# Altium PCB ESP32_RGB_Controller.PcbDoc
Units mm, origin at the board's own origin, x right, y up, seen from the top; angles counter-clockwise.
Board outline 30.23 x 52.83 mm, 2 copper layers (Top Layer, Bottom Layer); 9 components, 11 nets, 27 pads, 33 vias.
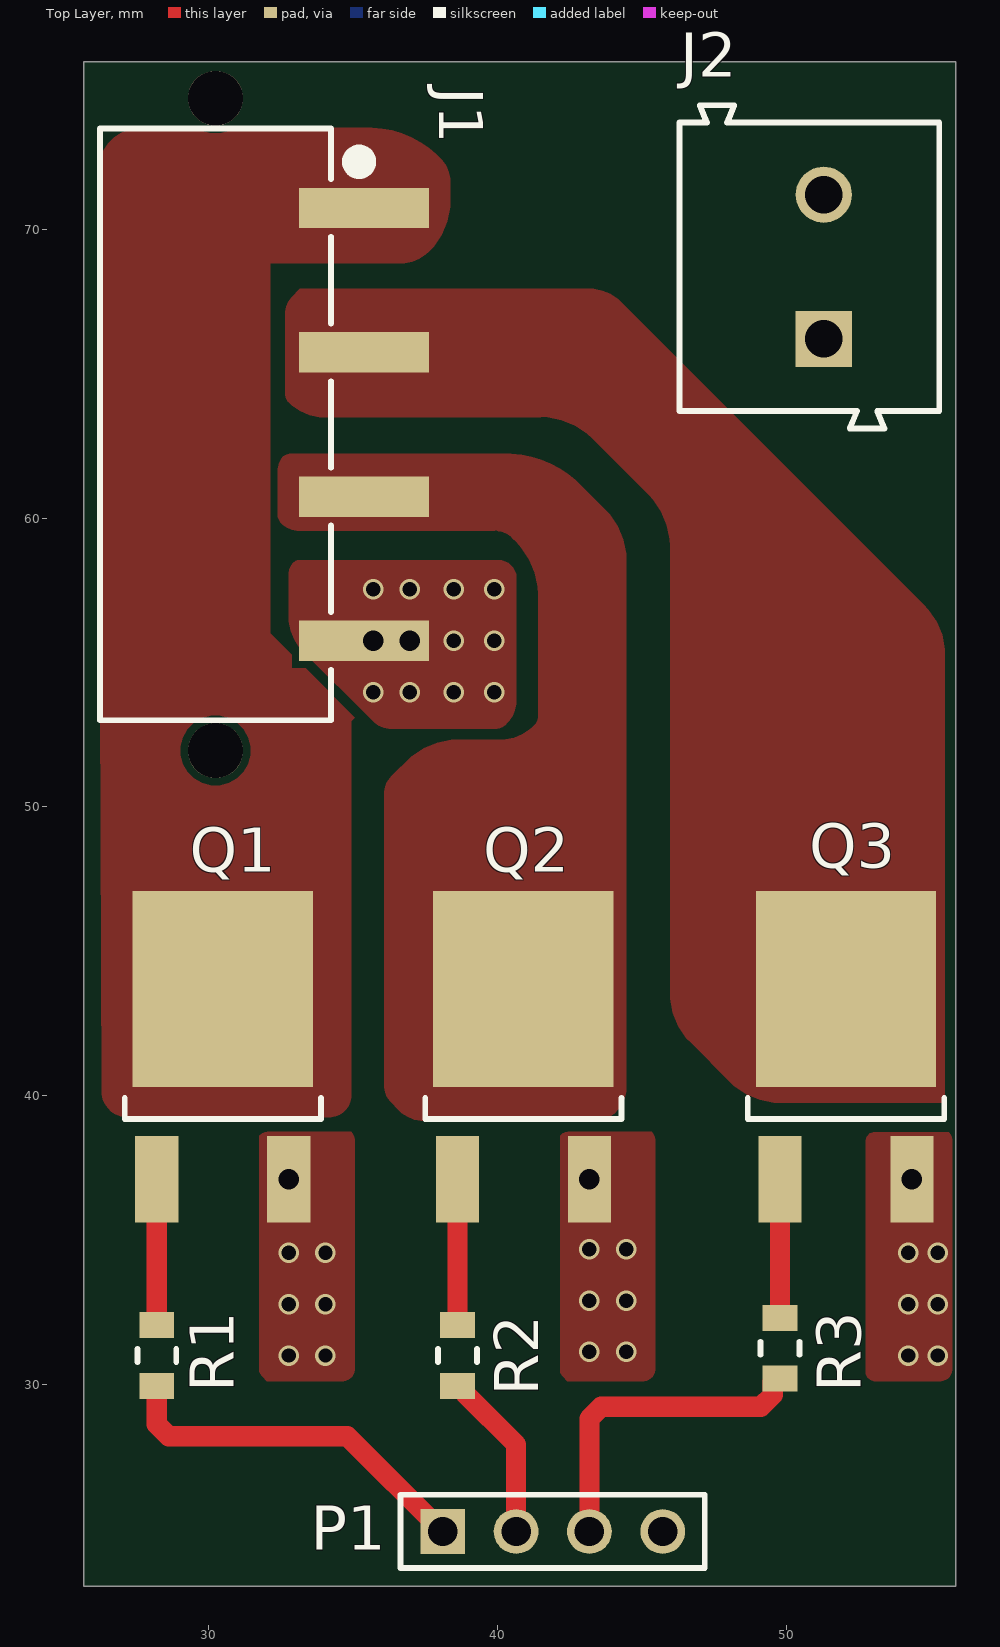
[diagram p0: Top Layer view]
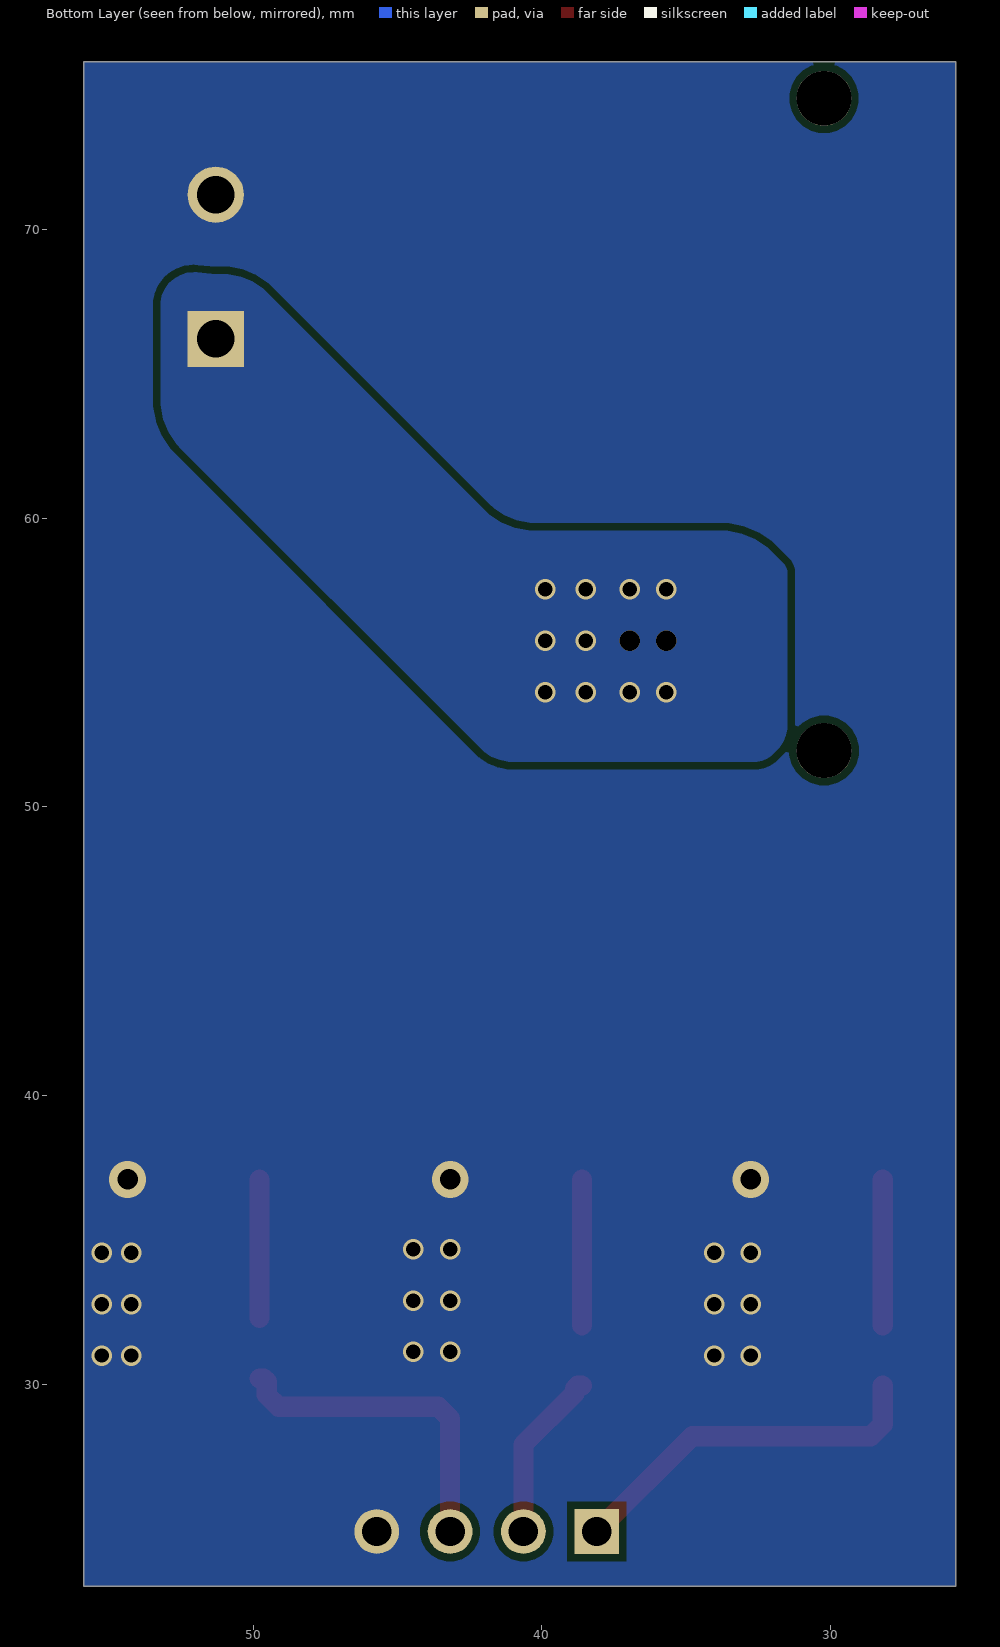
[diagram p1: Bottom Layer view, seen from below]
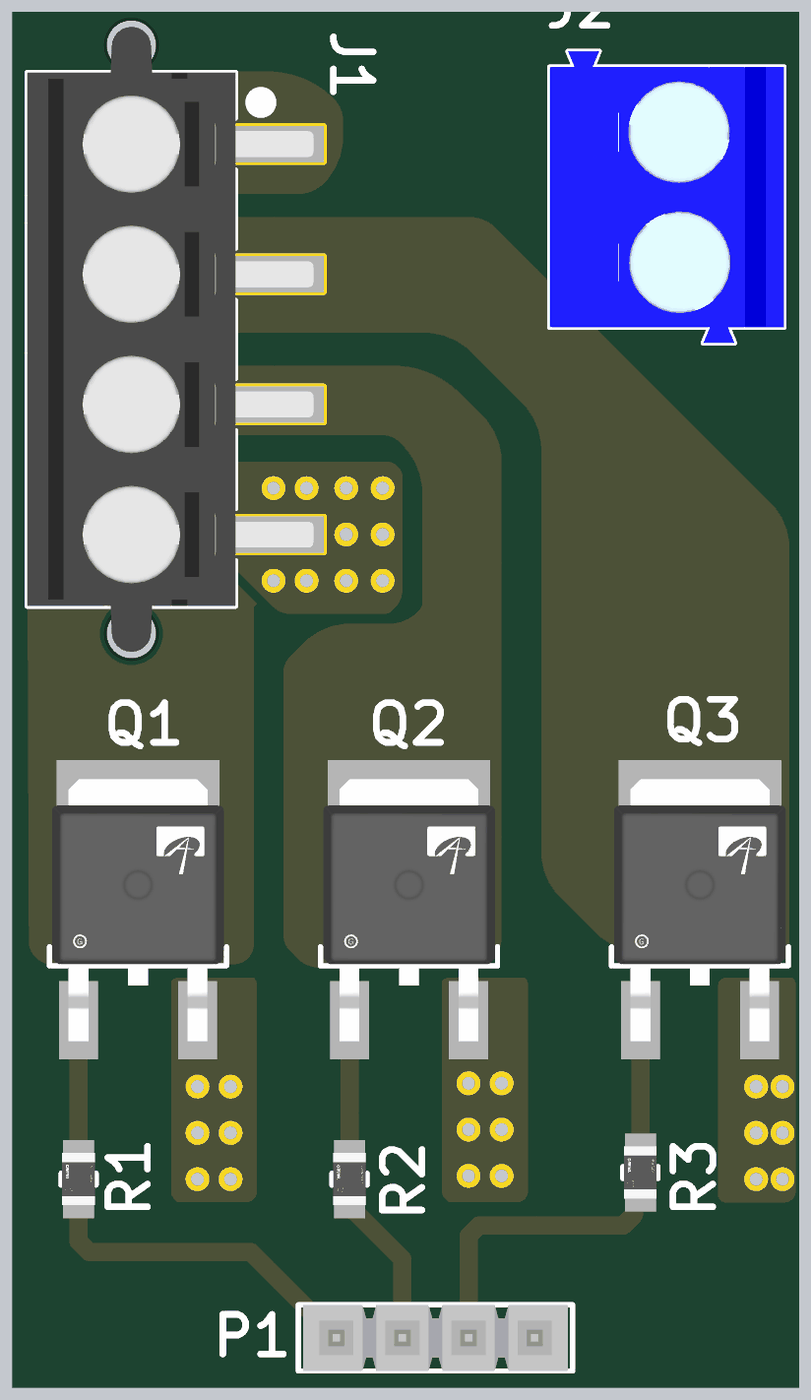
[diagram p2: 3D render of the assembled board from above, using the file's embedded part models]

## Layer stack, top to bottom
Top Solder: solder mask 0.0102, Solder Resist, Dk 3.5
Top Layer: signal copper 0.0356
Dielectric 1: dielectric 0.32, FR-4, Dk 4.8
Bottom Layer: signal copper 0.0356
Bottom Solder: solder mask 0.0102, Solder Resist, Dk 3.5

## Board outline
25.654,22.987 55.88,22.987 55.88,75.819 25.654,75.819

## Design rules (kind name [scope] priority, off if disabled: settings)
Clearance [All] p1: gap=0.254 ignorepadtopadclearanceinfootprint=FALSE except(0: Arc-Hole Track-Hole SMDPad-Hole THPad-Hole Via-Hole Fill-Hole Poly-Hole Region-Hole Text-Hole)
PolygonConnect [All] p1: connectstyle=Direct reliefconductorwidth=0.254 reliefentries=4 polygonreliefangle="90 Angle" airgapwidth=0.254
RoomDefinition ESP32_RGB_Controller [InComponentClass('ESP32_RGB_Controller')] p1: confinementstyle=ConfineIn formatcopy=TRUE lockcomponents=FALSE outline 178.816,24.003 248.158,24.003 248.158,51.943 178.816,51.943
RoutingVias [All] p1: holewidth=0.711 width=1.27 viastyle="Through Hole" minholewidth=0.711 minwidth=1.27 maxholewidth=0.711 maxwidth=1.27
SolderMaskExpansion [All] p1: expansion=0.102 istentingtop=FALSE
Width [All] p1: maxlimit=2.254 minlimit=0.254 preferedwidth=0.754 toplayer_prefwidth=0.7 minimp=50.000000 maximp=50.000000 favimp=50.000000
30 further rules are at their usual default settings.

## Classes and differential pairs
component class ESP32_RGB_Controller: J1 J2 P1 Q1 Q3 R1 R3

## Components (designator, comment, footprint, x,y, rotation, side; value= is the part's Value field where it differs from the comment)
J1 "691709710304" 691709710304 30.226,63.246 r270 top
J2 "691101710002" 691101710002 50.8,68.707 r90 top
P1 "TSW-104-08-L-S" SMTC-TSW-104-08-X-S 38.1,24.892 r0 top
Q1 "AOD4184A" FP-TO252-MFG 30.48,42.291 r0 top
Q2 "AOD4184A" FP-TO252-MFG 40.894,42.291 r0 top
Q3 "AOD4184A" FP-TO252-MFG 52.07,42.291 r0 top
R1 "R0805 100" FP-SR0805-MFG 28.194,30.988 r90 top value=100Ω
R2 "R0805 100" FP-SR0805-MFG 38.608,30.988 r90 top value=100Ω
R3 "R0805 100" FP-SR0805-MFG 49.784,31.242 r90 top value=100Ω

## Footprints (in the part's own frame and the unit in brackets; to place one, negate y for a bottom-side part, rotate by r counter-clockwise, add the part's x,y. Pads: shape width x height; smd on the part's side, far side on the other; paste and mask are expansions set on the pad)
691101710002 [mm] "5,00mm - modular - blue - Horizontal entry with pressure clamp - 12,6mm height - 02p"
  rect 1.95x1.95 hole 1.3: 1(-2.5,-0.5)
  round 1.95 hole 1.3: 2(2.5,-0.5)
  silkscreen extent -5.6,-4.5 5.6,4.5, body extent -5.6,-4.5 5.6,4.5, height 12.65
691709710304 [mm] "Horizontal Entry SMT with Pressure Clamp, pitch 5mm, 04p"
  rect 1.4x4.5 smd: 1(-7.5,5.15) 2(-2.5,5.15) 3(2.5,5.15) 4(7.5,5.15)
  round 1.9 hole 1.9 unplated: M1(-11.3,0) M2(11.3,0)
  silkscreen extent -10.25,-4 10.25,5.17, body extent -12,-4 12,7, height 9.95
FP-SR0805-MFG [mm]
  rect 0.9x1.2 smd paste+0 mask+0: 1(-1.05,0) 2(1.05,0)
  silkscreen extent -0.23,-0.67 0.23,0.67, body extent -1.6,-0.77 1.6,0.77, height 0.25
FP-TO252-MFG [mm]
  rect 1.5x3 smd paste+0 mask+0: 1(-2.286,-5.202) 3(2.286,-5.202)
  rect 6.25x6.8 smd paste+0 mask+0: 4(0,1.398)
  silkscreen extent -3.4,-3.11 3.4,-2.38, body extent -3.58,-6.8 3.58,4.9, height 0.25
SMTC-TSW-104-08-X-S [mm] ".025 SQ Post Terminal Strip Assembly, 1x4 Pins, Vertical, 2.54mm Pitch, Male"
  rect 1.55x1.55 hole 1.02: 1(0,0)
  round 1.55 hole 1.02: 2(2.54,0) 3(5.08,0) 4(7.62,0)
  silkscreen extent -1.46,-1.27 9.08,1.27, body extent -1.27,-1.27 8.89,1.27, height 8.38

## Part data
J1: library part CMP-1502-03337-1, "Serie 7097 - 5.00 mm Horizontal Entry SMT with Pressure Clamp WR-TBL, 4 pin", Manufacturer="Wurth Elektronik", Operating Temperature=-45to130degC, Datasheet URL=http://katalog.we-online.de/em/datasheet/6917097103xx.pdf, Manufacturer URL=http://www.we-online.de, Mounting Technology=SMT, Package Reference=691709710304, Packaging=TapeandReelwithCap, Part Number=691709710304, Pin Number=4, Pitch=5.00mm, Publisher=WurthElektronik
J2: library part CMP-1502-03256-1, "Series 101 - 5.00 mm Horizontal Entry Modular with Pressure Clamp WR-TBL, 2 pin", Manufacturer="Wurth Elektronik", Operating Temperature=-40to105degC, Datasheet URL=http://katalog.we-online.de/em/datasheet/6911017100xx.pdf, Manufacturer URL=http://www.we-online.de, Mounting Technology=THT, Package Reference=691101710002, Packaging=Box, Part Number=691101710002, Pin Number=2, Pitch=5.00mm, Publisher=WurthElektronik
P1: library part CMP-1024-00358-1, "0.025\" SQ Post Header, Through-hole, Vertical, -55 to 125 degC, 2.54 mm Pitch, 4-Pin, Male, RoHS", Manufacturer=Samtec, Temperature Range="-55 to 125 degC", ComponentLink1Description="Manufacturer URL", ComponentLink1URL=http://www.samtec.com, ComponentLink2Description=Datasheet, ComponentLink2URL=http://www.samtec.com/documents/webfiles/pdf/TSW_TH.PDF, ComponentLink3Description="Package Specification", ComponentLink3URL=http://www.samtec.com/documents/webfiles/cpdf/TSW-XXX-XX-XXX-X-XX-XXX-MKT.pdf, DatasheetVersion=F-214, Mounting Technology=Through-hole, Orientation=Vertical, PackageDescription=".025[0.64] SQ. Post Terminal Strip Assembly", PackageReference=TSW-104-08-X-S, PackageVersion="DM, 8/1988", PartNumber=TSW-104-08-L-S, Pitch="2.54 mm", RoHS=True
Q1 Q2 Q3: library part CMP-83955-000007-1, "MOSFET N-CH 40V 50A TO252", Case/Package=DPAK, Continuous Drain Current (ID)=50A, Drain to Source Voltage (Vdss)=40V, Gate to Source Voltage (Vgs)=20V, Input Capacitance=1.8nF, Max Operating Temperature=175°C, Max Power Dissipation=2.3W, Min Operating Temperature=-55°C, Power Dissipation=50W, Mount="Surface Mount", Number of Elements=1, Number of Pins=3, Packaging="Cut Tape", Radiation Hardening=No, Rds On Max=7mR
R1 R2 R3: library part CMP-03412-018383-1, "RES 100 OHM 1% 1/2W 0805", Manufacturer=Yageo, Manufacturer Part Number=SR0805FR-47100RL, Package=SR0805, Power Rating=0.5W, Resistance=100Ω, Temperature="-55°C to +155°C", Temperature Range High=+155°C, Temperature Range Low=-55°C, Tolerance=0.01, Voltage Rating=150V, Automotive=Yes, Automotive Grade="Grade 0", Category=Res, ComponentLink2Description=Datasheet, ComponentLink2URL=http://www.yageo.com/documents/recent/PYu-SR_D_F%20tol_RoHS_L_3.pdf, Composition="Thick Film", Device Class L1="Passive Components", Device Class L2=Resistors, Device Class L3="Chip SMD Resistors", Digikey Description="RES 100 OHM 1% 1/2W 0805", Footprint Url=http://www.yageo.com/exep/pages/download/literatures/PYu-R_Mount_10.pdf, Height=0.6mm, Ipc Land Pattern Name=RESC200125X50, Lead Free=Yes, Octopart=https://octopart.com/sr0805fr-47100rl-yageo-91478093, RoHS=TRUE, Series=SR

## Via types
v1: diameter 0.711, hole 0.5, Top Layer to Bottom Layer, 27 vias
v2: diameter 1.27, hole 0.711, Top Layer to Bottom Layer, 3 vias
v3: diameter 0.711, hole 0.711, Top Layer to Bottom Layer, 2 vias
v4: diameter 0.711, hole 0.511, Top Layer to Bottom Layer, 1 vias

## Nets (pads, with @x,y where several pads share a name; then routed paths per layer and width w, separated by ;. In a path a pad name is that pad's centre, name@x,y a point inside that pad or via, vN(x,y) a via of type N, cw(c..) or ccw(c..) an arc to the next point about the centre after c; other vN are vias at no path point)
B: J1.3 Q2.4
G: J1.2 Q3.4
GND: J2.2 P1.4 Q1.3 Q2.3 Q3.3
  other v1: 32.766,30.988 34.036,30.988 54.229,30.988 55.245,30.988 43.18,31.115 44.45,31.115 32.766,32.766 34.036,32.766 54.229,32.766 55.245,32.766 43.18,32.893 44.45,32.893 32.766,34.544 34.036,34.544 54.229,34.544 55.245,34.544 43.18,34.671 44.45,34.671
  other v2: 32.766,37.089 43.18,37.088 54.356,37.088
NetP1_1: P1.1 R1.1 | length 12.8
  Top Layer w0.7: R1.1 28.194,28.604 28.604,28.194 34.798,28.194 P1.1
NetP1_2: P1.2 R2.1 | length 6
  Top Layer w0.7: R2.1 38.758,29.938 38.858,29.838 38.858,29.688 40.64,27.906 P1.2
NetP1_3: P1.3 R3.1 | length 11.4
  Top Layer w0.7: P1.3 43.18,28.8 43.59,29.21 49.124,29.21 49.534,29.62 49.534,30.092 49.634,30.192 R3.1
NetQ1_1: Q1.1 R1.2 | length 5.1
  Top Layer w0.7: R1.2 Q1.1
NetQ2_1: Q2.1 R2.2 | length 5.1
  Top Layer w0.7: R2.2 Q2.1
NetQ3_1: Q3.1 R3.2 | length 4.8
  Top Layer w0.7: R3.2 Q3.1
R: J1.1 Q1.4
VCC: J1.4 J2.1
  other v1: 35.687,53.975 36.957,53.975 38.481,53.975 39.878,53.975 39.878,55.753 35.687,57.531 36.957,57.531 38.481,57.531 39.878,57.531
  other v3: 35.687,55.753 36.957,55.753
  other v4: 38.481,55.753
pads on no net: J1.M1 J1.M2

## Polygon pours and split planes (outlines as drawn)
GND on Top Layer "GND_L01_P007" (solid, pour order 7): 52.758,38.407 52.758,30.427 ccw(c53.09,30.427) 53.09,30.094 55.319,30.094 ccw(c55.319,30.528) 55.626,30.221 ccw(c55.319,30.528) 55.753,30.528 55.753,38.424 ccw(c55.32,38.424) 55.626,38.73 53.081,38.73 ccw(c53.081,38.407)
GND on Top Layer "GND_L01_P005" (solid, pour order 5): 42.471,38.735 ccw(c42.471,38.301) 42.164,38.608 42.164,30.48 ccw(c42.471,30.48) 42.254,30.263 42.418,30.099 45.032,30.099 ccw(c45.032,30.533) 45.339,30.226 ccw(c45.032,30.533) 45.466,30.533 45.466,38.428 ccw(c45.032,38.428) 45.339,38.735
GND on Top Layer "GND_L01_P004" (solid, pour order 4): 32.057,38.735 ccw(c32.057,38.301) 31.75,38.608 31.75,30.48 ccw(c32.057,30.48) 31.84,30.263 32.004,30.099 34.618,30.099 ccw(c34.618,30.533) 34.925,30.226 ccw(c34.618,30.533) 35.052,30.533 35.052,38.428 ccw(c34.618,38.428) 34.925,38.735
G on Top Layer "G_L01_P003" (solid, pour order 3): 43.18,67.945 cw(c43.18,66.412) 44.264,67.496 54.75,57.01 cw(c52.959,55.209) 55.499,55.209 55.499,39.751 49.82,39.751 cw(c49.82,42.291) 48.024,40.495 46.718,41.801 cw(c48.514,43.597) 45.974,43.597 45.974,59.019 ccw(c43.434,59.019) 45.23,60.815 43.289,62.756 ccw(c41.493,60.96) 41.493,63.5 33.992,63.5 cw(c33.992,65.234) 32.766,64.008 cw(c33.073,64.315) 32.639,64.315 32.639,67.056 cw(c33.559,67.056) 32.908,67.706 33.147,67.945
B on Top Layer "B_L01_P002" (solid, pour order 2): 37.465,39.116 cw(c37.465,40.342) 36.598,39.475 36.322,39.751 cw(c36.935,40.364) 36.068,40.364 36.068,50.441 cw(c36.935,50.441) 36.322,51.054 36.848,51.58 cw(c38.644,49.784) 38.644,52.324 40.132,52.324 ccw(c40.132,53.857) 41.216,52.773 41.275,52.832 ccw(c40.968,53.139) 41.402,53.139 41.402,57.368 ccw(c38.862,57.368) 40.658,59.164 40.513,59.309 ccw(c39.9,58.696) 39.9,59.563 33.125,59.563 cw(c33.125,60.43) 32.512,59.817 cw(c32.819,60.124) 32.385,60.124 32.385,61.617 cw(c33.252,61.617) 32.475,62.001 cw(c32.843,61.819) 32.843,62.23 40.303,62.23 cw(c40.303,58.656) 42.83,61.183 43.706,60.307 cw(c41.91,58.511) 44.45,58.511 44.45,40.259 cw(c43.307,40.259) 43.307,39.116
VCC on Top Layer "VCC_L01_P001" (solid, pour order 1): 33.125,58.547 40.027,58.547 cw(c40.027,57.934) 40.64,57.934 40.64,53.647 cw(c39.593,53.647) 40.333,52.906 40.259,52.832 cw(c39.952,53.138) 39.952,52.705 36.322,52.705 cw(c36.322,53.625) 35.672,52.974 33.274,55.372 cw(c34.5,56.598) 32.766,56.598 32.766,58.039 cw(c33.379,58.039) 32.946,58.473 cw(c33.125,58.293)
R on Top Layer "R_L01_P000" (solid, pour order 0): 27.179,39.243 34.163,39.243 ccw(c34.163,40.005) 34.925,40.005 34.925,52.959 35.052,53.086 32.131,56.007 32.131,68.834 36.648,68.834 ccw(c36.648,70.193) 37.609,69.232 ccw(c35.81,71.031) 38.354,71.031 38.354,71.641 ccw(c37.158,71.641) 38.004,72.486 ccw(c35.477,69.959) 35.477,73.533 27.683,73.533 ccw(c27.683,72.017) 26.168,72.012 26.286,40.133 ccw(c27.179,40.137)
GND on Bottom Layer "GND_L02_P011" (solid, pour order 11): 55.88,75.819 25.654,75.819 25.654,22.987 55.88,22.987
VCC on Bottom Layer "VCC_L02_P010" (solid, pour order 10): 51.308,68.453 51.085,68.453 ccw(c51.085,66.232) 49.515,67.803 42.019,60.307 cw(c40.223,62.103) 40.223,59.563 33.818,59.563 ccw(c33.818,57.023) 32.022,58.819 31.623,58.42 ccw(c31.93,58.113) 31.496,58.113 31.496,52.832 ccw(c32.722,52.832) 31.855,51.965 32.004,51.816 ccw(c32.617,52.429) 32.617,51.562 41.021,51.562 ccw(c41.021,53.095) 42.105,52.011 52.469,62.375 ccw(c50.673,64.171) 53.213,64.171 53.213,67.354 ccw(c52.051,67.354) 51.946,68.511
VCC on Bottom Layer "VCC_L02_P009" (solid, pour order 9): 51.308,68.707 48.296,68.707 ccw(c48.296,66.167) 46.5,67.963 40.114,61.577 cw(c38.318,63.373) 38.318,60.833 35.052,60.833 ccw(c35.052,59.3) 33.968,60.384 33.655,60.071 ccw(c33.962,59.764) 33.528,59.764 33.528,52.832 ccw(c34.754,52.832) 33.887,51.965 34.036,51.816 42.418,51.816 ccw(c42.418,53.962) 43.936,52.445 52.596,61.105 ccw(c50.8,62.901) 53.34,62.901 53.34,67.66 ccw(c52.039,67.66) 52.959,68.58